# Altium PCB 1ff_adapter.PcbDoc
Units mil, origin at the board's own origin, x right, y up, seen from the top; angles counter-clockwise.
Board outline 2127.2 x 3928.15 mil, 2 copper layers (Top Layer, Bottom Layer); 5 components, 8 nets, 44 pads, 58 vias.
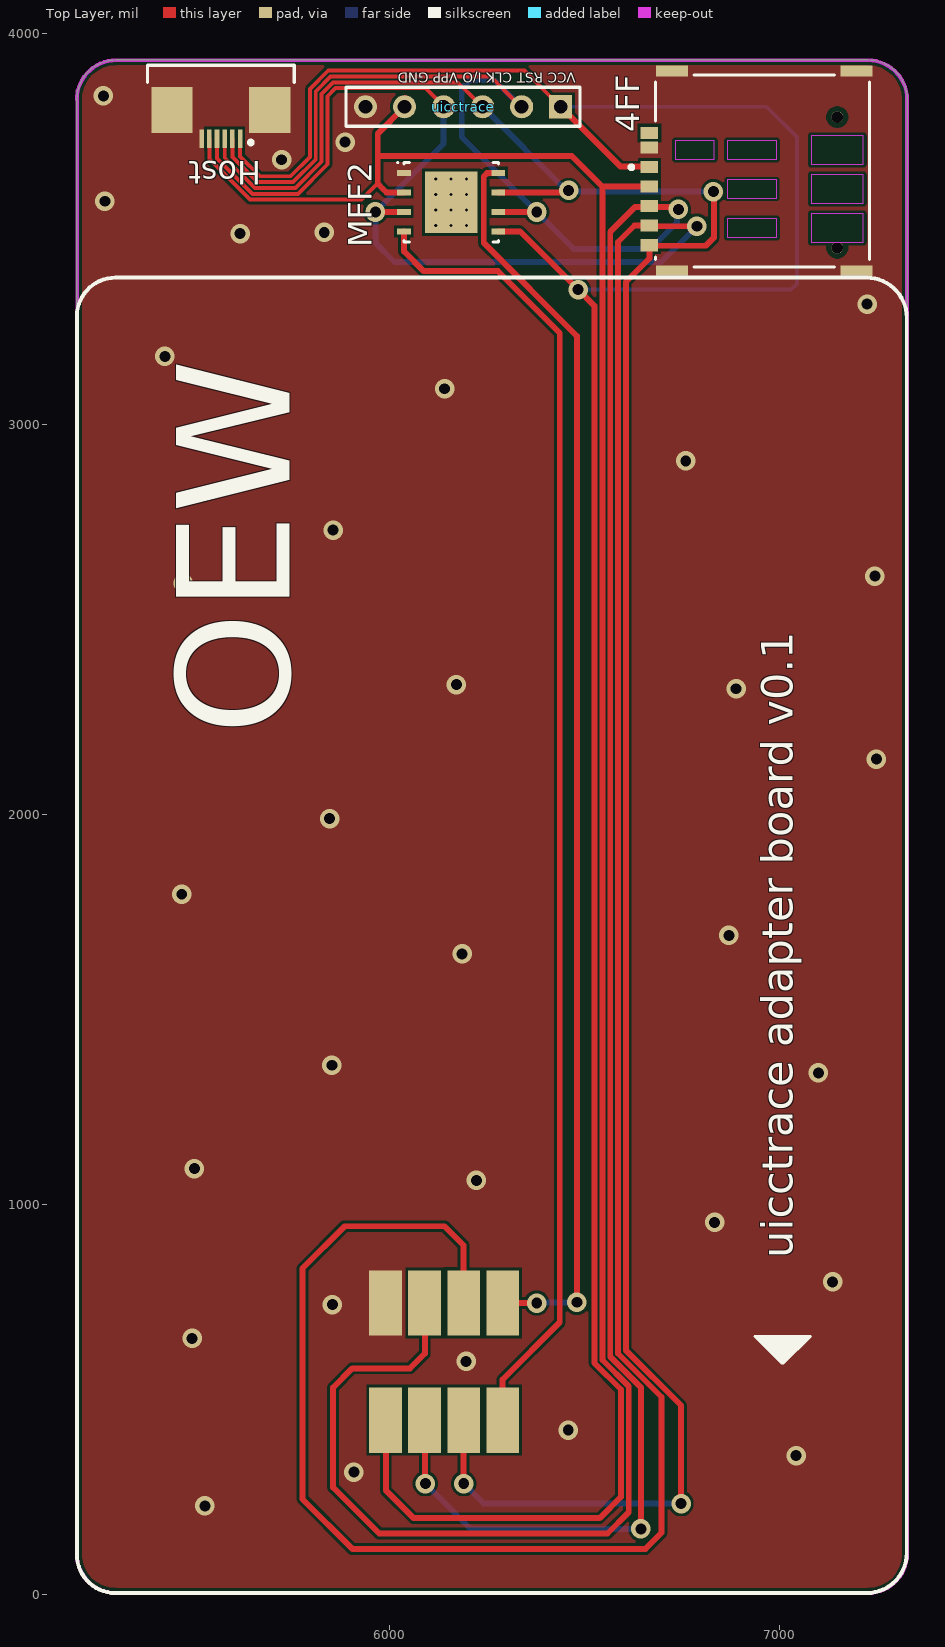
[diagram p0: Top Layer view]
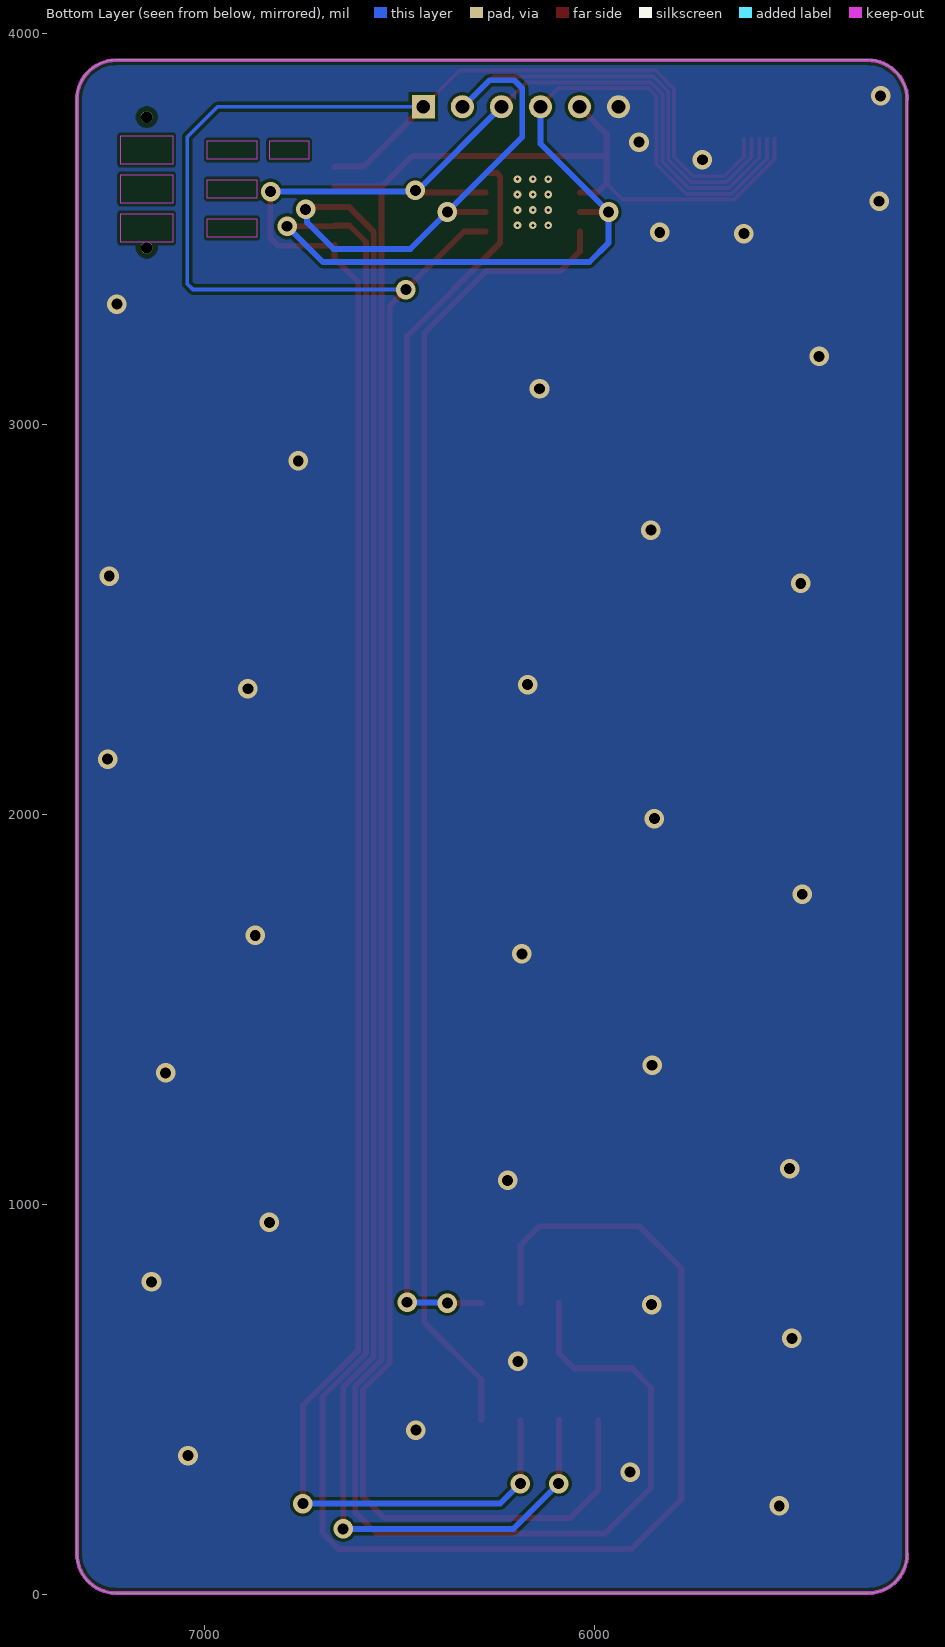
[diagram p1: Bottom Layer view, seen from below]

## Layer stack, top to bottom
Top Solder: solder mask 0.4, Solder Resist, Dk 3.5
Top Layer: signal copper 1.4
Dielectric 1: dielectric 12.6, FR-4, Dk 4.8
Bottom Layer: signal copper 1.4
Bottom Solder: solder mask 0.4, Solder Resist, Dk 3.5

## Board outline
5200,105 ccw(c5300,105) 5300,5 5299.02,4.8 7226.02,4.8 7227,5 ccw(c7227,105) 7327,105 7326.77,3831.69 7327,3832.94 ccw(c7227,3832.94) 7227,3932.94 5300,3932.94 ccw(c5300,3832.94) 5200,3832.94 5199.8,3832.68

## Design rules (kind name [scope] priority, off if disabled: settings)
Clearance [All] p1: gap=7.87 ignorepadtopadclearanceinfootprint=TRUE except(5: Arc-Arc Arc-Track Track-Track; 10: Arc-Via Track-Via; 13: Arc-Hole Track-Hole SMDPad-Hole THPad-Hole Via-Hole Fill-Hole Poly-Hole Region-Hole)
DiffPairsRouting [All] p1: maxlimit=10 minlimit=3.5 mostfreqgap=10 toplayer_minwidth=3.5 toplayer_maxwidth=15 toplayer_prefwidth=15 bottomlayer_minwidth=3.5 bottomlayer_maxwidth=15 bottomlayer_prefwidth=15 maxuncoupledlength=500
HoleSize [All] p1: absolutevalues=TRUE maxlimit=248.03 minlimit=7.87 maxpercent=80.000 minpercent=20.000
HoleToHoleClearance [All] p1: gap=19.68 allowstackedmicrovias=TRUE
MinimumSolderMaskSliver [All] p1: minsoldermaskwidth=7.87
PasteMaskExpansion [All] p1: expansion=1.97
PlaneClearance [All] p1: clearance=7.87
PlaneConnect [All] p1: planeconnectstyle=Direct reliefexpansion=20 reliefentries=4 reliefconductorwidth=10 reliefairgap=10
PolygonConnect [All] p1: connectstyle=Direct reliefconductorwidth=10 reliefentries=4 polygonreliefangle="90 Angle" airgapwidth=10
RoutingCorners [All] p1: cornerstyle=Round minsetback=100 maxsetback=100
RoutingVias [All] p1: holewidth=15 width=30 viastyle="Through Hole" minholewidth=11.81 minwidth=23.62 maxholewidth=248.03 maxwidth=300
SilkToSilkClearance [All] p1: silktosilkclearance=0
SilkToSolderMaskClearance [IsPad] p1: minsilkscreentomaskgap=5.91 clearancetoexposedcopper=TRUE
SolderMaskExpansion [All] p1: expansion=1.97 istentingtop=FALSE
Width [All] p1: maxlimit=200 minlimit=5 preferedwidth=10
20 further rules are at their usual default settings.

## Classes and differential pairs
component class 1ff_adapter: 4FF Host MFF2 "uicctrace adapter board v0.1"

## Components (designator, comment, footprint, x,y, rotation, side; value= is the part's Value field where it differs from the comment)
4FF "SIM8066-6-1-14-01-A" FP-SIM8066-6-1-14-01-A-MFG 6956.69,3648.62 r90 top locked (schematic designator J1)
Host "68710614022" 68710614022 -44431.3,-46168.31 r180 top locked (schematic designator J2)
MFF2 "MFF2" SON127P600-8N 6158.66,3568.31 r0 top locked (schematic designator P2)
uicctrace "Header 6" HDR1X6 6439.37,3812.99 r180 top locked (schematic designator P3)
"uicctrace adapter board v0.1" "ISO 7816-2" "ISO 7816-2-Footprint-1" 5200,5 r0 top locked (schematic designator P1)

## Footprints (in the part's own frame and the unit in brackets; to place one, negate y for a bottom-side part, rotate by r counter-clockwise, add the part's x,y. Pads: shape width x height; smd on the part's side, far side on the other; paste and mask are expansions set on the pad)
68710614022 [mm] "ZIF Connectors, Horizontal, Top Contact, pitch 0.5mm, 6p"
  rect 0.3x1.2 smd: 1(-1271.25,-1267.44) 2(-1270.75,-1267.44) 3(-1270.25,-1267.44) 4(-1269.75,-1267.44) 5(-1269.25,-1267.44) 6(-1268.75,-1267.44)
  rect 2.7x3 smd: M1(-1273.18,-1269.3) M2(-1266.82,-1269.3)
  silkscreen extent -1274.77,-1272.22 -1265.23,-1267.08, body extent -1274.7,-1272.15 -1265.3,-1267.05, height 2.1
FP-SIM8066-6-1-14-01-A-MFG [mm]
  rect 0.7x2.1 smd paste+0 mask+0: 1(-6.5,5.89) 2(6.5,5.89) 3(-6.5,-6.11) 4(6.5,-6.11)
  rect 0.8x1.14 smd paste+0 mask+0: C1(0.25,7.37) C2(-2.29,7.37) C3(-4.83,7.37) C5(1.52,7.37) C6(-1.02,7.37) C7(-3.56,7.37) CD(2.47,7.37)
  round 0.75 hole 0.75 unplated paste-1000 mask+0: ""(-5,-4.86) ""(3.5,-4.86)
  Keep-Out Layer region: 0.76,3.135 1.96,3.135 1.96,5.685 0.76,5.685
  Keep-Out Layer region: 0.76,-0.915 1.96,-0.915 1.96,2.295 0.76,2.295
  Keep-Out Layer region: -1.78,-0.915 -0.58,-0.915 -0.58,2.295 -1.78,2.295
  Keep-Out Layer region: -4.32,-0.915 -3.12,-0.915 -3.12,2.295 -4.32,2.295
  Keep-Out Layer region: -4.645,-6.56 -2.795,-6.56 -2.795,-3.16 -4.645,-3.16
  Keep-Out Layer region: -2.105,-6.56 -0.255,-6.56 -0.255,-3.16 -2.105,-3.16
  Keep-Out Layer region: 0.435,-6.56 2.285,-6.56 2.285,-3.16 0.435,-3.16
  silkscreen extent -6.24,-6.96 6.24,8.66, body extent -6.95,-7.26 6.95,8.04, height 0.25
HDR1X6 [mm] "Connector; Header; 6 Position"
  rect 1.5x1.5 hole 0.9: 1(0,0)
  round 1.5 hole 0.9: 2(2.54,0) 3(5.08,0) 4(7.62,0) 5(10.16,0) 6(12.7,0)
  silkscreen extent -1.27,-1.27 13.97,1.27
"ISO 7816-2-Footprint-1" [mm]
  rect 2.125x4.25 / inner rect 0x0 / far side rect 0x0 all layers, no hole paste+0 mask+0: 1(20.08,11.25) 2(22.62,11.25) 3(25.16,11.25) 4(27.7,11.25) 5(20.08,18.87) 6(22.62,18.87) 7(25.16,18.87) 8(27.7,18.87)
  silkscreen extent 0,0 54,85.6
SON127P600-8N [mm]
  rect 0.9x0.4 smd: 1(-3.07,1.905) 2(-3.07,0.635) 3(-3.07,-0.635) 4(-3.07,-1.905) 5(3.07,-1.905) 6(3.07,-0.635) 7(3.07,0.635) 8(3.07,1.905)
  rect 3.4x4 smd paste-1.7: 9(0,0)
  silkscreen extent -3.52,-2.58 3.08,2.62, body extent -2.92,-2.42 2.93,2.42, height 0.4

## Part data
4FF: library part CMP-03329-117635865-1, "SIM8066-6-1-14-01-A Memory Card Connectors 1.44mm Nano SIM Conn w/Peg and Switch", Current Rating=1A, Max Operating Temperature=85°C, Min Operating Temperature=-40°C, Voltage Rating=30V, Contact Material="Gold, Nickel", NexarPartId=117635865, Number of Contacts=6, Number of Pins=6
Host: library part CMP-1502-01549-2, Contact Resistance=20mΩ, Current Rating=500mA, Flammability Rating="UL94 V-0", Insulation Resistance=100MΩ, Max Operating Temperature=85°C, Min Operating Temperature=-25°C, Operating Supply Voltage=50V, Actuator Material="Liquid Crystal Polymer, Polymer", Contact Location=Top, Contact Material=Tin, Contact Plating=Tin, Gender=Male, Height=2.25mm, Housing Material="Liquid Crystal Polymer", Lead Pitch=500µm, Length=3.6mm, Mount="Surface Mount", NexarPartId=8917696, Number of Contacts=6, Number of Pins=6, Number of Positions=6, Number of Rows=1, Orientation=Horizontal, Packaging="Tape and Reel", Pitch=500µm, REACH SVHC=Unknown, RoHS=Compliant, Termination=SMD/SMT, Voltage Rating=50V, Width=2.1mm
MFF2: library part CMP-00008-1, "ETSI TS 102 671 V18.0.0 (2022-11) MFF2"
uicctrace: "Header, 6-Pin", LatestRevisionDate=17-Jul-2002, LatestRevisionNote="Re-released for DXP Platform.", Publisher="Altium Limited"
"uicctrace adapter board v0.1": library part CMP-00007-2

## Via types
v1: diameter 50, hole 28, Top Layer to Bottom Layer, tented both sides, 46 vias
v2: diameter 19.68, hole 7.87, Top Layer to Bottom Layer, tented both sides, 12 vias

## Nets (pads, with @x,y where several pads share a name; then routed paths per layer and width w, separated by ;. In a path a pad name is that pad's centre, name@x,y a point inside that pad or via, vN(x,y) a via of type N, cw(c..) or ccw(c..) an arc to the next point about the centre after c; other vN are vias at no path point)
CLK: 4FF.C3 "uicctrace adapter board v0.1.3" Host.3 MFF2.7 uicctrace.3 | length 6165.5
  Top Layer w10: Host.3@5578.66,3731.56 5578.66,3682.27 5656.09,3604.84 5759.66,3604.84 5826.77,3671.95 5826.77,3846.02 5856.27,3875.51 6175.67,3875.51 uicctrace.3@6223.47,3827.71
  Top Layer w15: 6190.55,447.91 6190.55,285.83 v1(6190.94,285.43) ; MFF2.7 6454.53,3593.31 v1(6459.65,3598.43) ; v1(6748.03,234.25) 6748.03,485.24 6606.26,627.01 6606.26,3364.13 6666.54,3424.41 4FF.C3 6668.31,3456.69 6811.02,3456.69 6831.69,3477.36 6831.69,3594.49 v1(6830.71,3595.47)
  Bottom Layer w15: v1(6190.94,285.43) 6242.13,234.25 v1(6748.03,234.25) ; uicctrace.3 6453.94,3598.43 v1(6459.65,3598.43) 6462.6,3595.47 v1(6830.71,3595.47)
GND: 4FF.1 4FF.2 4FF.3 4FF.4 4FF.C5 "uicctrace adapter board v0.1.5" Host.6 Host.M1 Host.M2 MFF2.1 uicctrace.6
  other v1: 5527.56,228.35 5909.45,314.96 7042.32,357.28 6458.66,422.24 6196.85,598.43 5495.08,657.48 5854.33,744.09 7135.83,802.17 6833.66,954.72 6223.43,1062.01 5500.98,1092.52 7099.41,1337.6 5853.35,1357.28 6187.01,1642.72 6870.08,1689.96 5468.5,1795.28 5847.44,1989.17 7248.03,2141.73 6888.78,2321.85 6172.24,2332.68 5472.44,2591.54 7244.09,2610.24 5856.3,2728.35 6759.84,2905.51 6141.73,3090.55 5425.2,3173.23 7224.41,3307.09 5618.11,3488.19 5833.66,3491.14 5271.65,3570.87 5724.41,3677.17 5886.81,3722.44 5267.72,3840.55
IO: 4FF.C7 "uicctrace adapter board v0.1.7" Host.4 MFF2.3 uicctrace.4 | length 8041.5
  Top Layer w10: Host.4@5558.07,3730.91 5558.98,3730 5558.98,3680.74 5649.87,3589.84 5765.87,3589.84 5841.77,3665.74 5841.77,3839.8 5862.48,3860.51 6093.23,3860.51 uicctrace.4@6127.48,3826.26
  Top Layer w15: v1(5964.57,3543.31) MFF2.3 ; 6190.55,747.91 6190.55,896.06 6141.73,944.88 5885.83,944.88 5777.56,836.61 5777.56,246.06 5905.51,118.11 6656.5,118.11 6697.83,159.45 6697.83,507.15 6586.26,618.72 6586.26,3466.18 6628.54,3508.46 4FF.C7 6668.11,3506.89 v1(6788.39,3506.89)
  Bottom Layer w15: uicctrace.4 6139.37,3718.11 v1(5964.57,3543.31) 5964.57,3464.57 6013.78,3415.35 6696.85,3415.35 v1(6788.39,3506.89)
RFU1: "uicctrace adapter board v0.1.4" MFF2.4 | length 3382.7
  Top Layer w15: MFF2.4 6037.8,3442.52 6088.58,3391.73 6278.54,3391.73 6437.01,3233.27 6437.01,698.82 6290.55,552.36 6290.55,447.91
RFU2: "uicctrace adapter board v0.1.8" MFF2.8 | length 3215.4
  Top Layer w15: MFF2.8 6279.15,3642.93 6250.91,3642.93 6242.13,3634.15 6242.13,3464.57 6480.85,3225.85 v1(6480.85,750) ; 6290.55,747.91 6290.67,748.03 v1(6377.95,748.03)
  Bottom Layer w15: v1(6377.95,748.03) 6378.94,749.02 6479.86,749.02 v1(6480.85,750)
RST: 4FF.C2 "uicctrace adapter board v0.1.2" Host.2 MFF2.6 uicctrace.2 | length 6491.4
  Top Layer w10: Host.2 5598.35,3730.79 5598.35,3683.8 5662.3,3619.84 5753.45,3619.84 5811.77,3678.17 5811.77,3852.23 5850.05,3890.51 6260.08,3890.51 uicctrace.2@6323.84,3826.75
  Top Layer w15: 6091.34,447.91 6091.34,286.61 v1(6092.52,285.43) ; MFF2.6 v1(6377.95,3543.31) ; v1(6644.69,169.29) 6644.69,532.01 6566.26,610.44 6566.26,3492.44 6630.38,3556.56 6734.78,3556.56 v1(6741.14,3550.2)
  Bottom Layer w15: v1(6092.52,285.43) 6208.66,169.29 v1(6644.69,169.29) ; uicctrace.2@6326.3,3824.29 6269.69,3880.91 6206.62,3880.91 6186.02,3860.31 6186.02,3735.24 v1(6377.95,3543.31) 6472.44,3448.82 6669.29,3448.82 6737.32,3516.85 6737.32,3546.37 v1(6741.14,3550.2)
VCC: 4FF.C1 "uicctrace adapter board v0.1.1" Host.1 MFF2.5 uicctrace.1 | length 7249.5
  Top Layer w10: Host.1 5617.91,3685.44 5668.51,3634.84 5747.23,3634.84 5796.77,3684.38 5796.77,3858.44 5843.84,3905.51 6346.85,3905.51 uicctrace.1
  Top Layer w15: 5991.34,447.91 5991.34,268.5 6062.99,196.85 6539.17,196.85 6593.68,251.37 6593.68,526.45 6525.59,594.54 6525.59,3255.13 6525.59,3303.15 v1(6484.25,3344.49) 6335.43,3493.31 MFF2.5 ; uicctrace.1 6592.91,3659.45 6665.55,3659.45 4FF.C1
  Bottom Layer w10: uicctrace.1 6966.54,3812.99 7044.29,3735.24 7044.29,3359.25 7029.53,3344.49 v1(6484.25,3344.49)
VPP: 4FF.C6 "uicctrace adapter board v0.1.6" Host.5 MFF2.2 uicctrace.5 | length 6506.4
  Top Layer w10: Host.5@5538.39,3730.91 5539.17,3730.12 5539.17,3679.33 5643.66,3574.84 5929.19,3574.84 5970.48,3616.13
  Top Layer w15: MFF2.2 6037.42,3593.68 5992.93,3593.68 5984.25,3602.36 5970.48,3616.13 5970.48,3687.01 ; uicctrace.5 5970.48,3744.1 5970.48,3687.01 ; uicctrace.5@6041.73,3812.99 uicctrace.5@6041.73,3835.65 ; 6091.34,747.91 6091.34,618.9 6053.15,580.71 5905.51,580.71 5856.3,531.5 5856.3,275.59 5974.41,157.48 6559.17,157.48 6613.68,212 6613.68,534.73 6546.26,602.16 6546.26,3608.27 ; 4FF.C6 6546.46,3608.46 6546.26,3608.27 ; 5970.48,3687.01 6467.52,3687.01 6546.26,3608.27
pads on no net: 4FF. 4FF.CD MFF2.9
copper on no net:
  other v2: 6119.29,3509.25 6158.66,3509.25 6198.03,3509.25 6119.29,3548.62 6158.66,3548.62 6198.03,3548.62 6119.29,3587.99 6158.66,3587.99 6198.03,3587.99 6119.29,3627.36 6158.66,3627.36 6198.03,3627.36

## Polygon pours and split planes (outlines as drawn)
GND on Bottom Layer "NONET_L-01_P-001" (solid, remove dead copper, pour order 2): 5298.23,3933.07 5273.62,3933.07 5254.92,3914.37 5242.13,3914.37 5213.58,3885.83 5213.58,3875 5199.8,3861.22 5199.8,110.24 5198.82,109.25 5199.8,108.27 5199.8,75.79 5210.63,64.96 5210.63,50.2 5221.46,39.37 5222.44,39.37 5241.14,20.67 5241.14,19.68 5258.86,19.68 5272.64,5.91 5302.17,5.91 5303.15,4.92 7259.84,4.92 7279.53,24.61 7283.46,24.61 7302.17,43.31 7302.17,51.18 7320.87,69.88 7320.87,92.52 7331.69,103.35 7328.74,106.3 7328.74,3842.52 7323.82,3847.44 7323.82,3866.14 7308.07,3881.89 7308.07,3887.8 7295.28,3900.59 7295.28,3902.56 7294.29,3902.56 7273.62,3923.23 7258.86,3923.23 7248.03,3934.06 7233.27,3934.06
GND on Top Layer "NONET_L-01_P-001" (solid, remove dead copper, pour order 1): 5299.21,3934.06 5290.35,3925.2 5254.92,3925.2 5219.49,3889.76 5213.58,3889.76 5213.58,3880.91 5198.82,3866.14 5198.82,100.39 5215.55,83.66 5215.55,44.29 5238.19,21.65 5258.86,21.65 5275.59,4.92 5358.27,4.92 5360.24,6.89 5361.22,5.91 7257.87,5.91 7282.48,30.51 7287.4,30.51 7287.4,32.48 7320.87,65.94 7320.87,92.52 7327.76,99.41 7326.77,100.39 7326.77,3845.47 7323.82,3848.43 7323.82,3866.14 7309.06,3880.91 7309.06,3888.78 7278.54,3919.29 7258.86,3919.29 7242.13,3936.02 7232.28,3936.02
no net on Top Overlay "NONET_L-01_P-001" (solid): 6929.13,665.76 7086.61,665.76 7007.87,587.02

## Keep-outs
Keep-Out Layer:
  lines w10: 5199.8,105.31 ccw(c5299.7,104.82) 5299.21,4.92 7226.38,4.92 ccw(c7226.38,105.31) 7326.77,105.31 7326.77,3828.74 ; 5199.8,3831.69 cw(c5300.2,3831.69) 5300.2,3932.09 7227.36,3932.09 cw(c7226.87,3832.18) 7326.77,3831.69 ; 5200.79,102.36 5200.79,3855.31

## Silkscreen, mask and mechanical layers (free items; w line width, h text height)
Top Overlay:
  text "VCC RST CLK I/O VPP GND" at 6477.36,3908.46 h44 r180
  text "OEW" at 5841.54,2202.76 h500 r90
Mechanical 2:
  lines w10: 5199.8,3832.68 5200,105 ccw(c5300,105) 5300,5 7227,5 ccw(c7227,105) 7327,105 7326.77,3831.69 ; 5200,3832.94 cw(c5300,3832.94) 5300,3932.94 7227,3932.94 cw(c7227,3832.94) 7327,3832.94 ; 5299.02,4.8 7226.02,4.8